# EAGLE board 411_AutoFan_V1.1 (EAGLE 9.6.2)
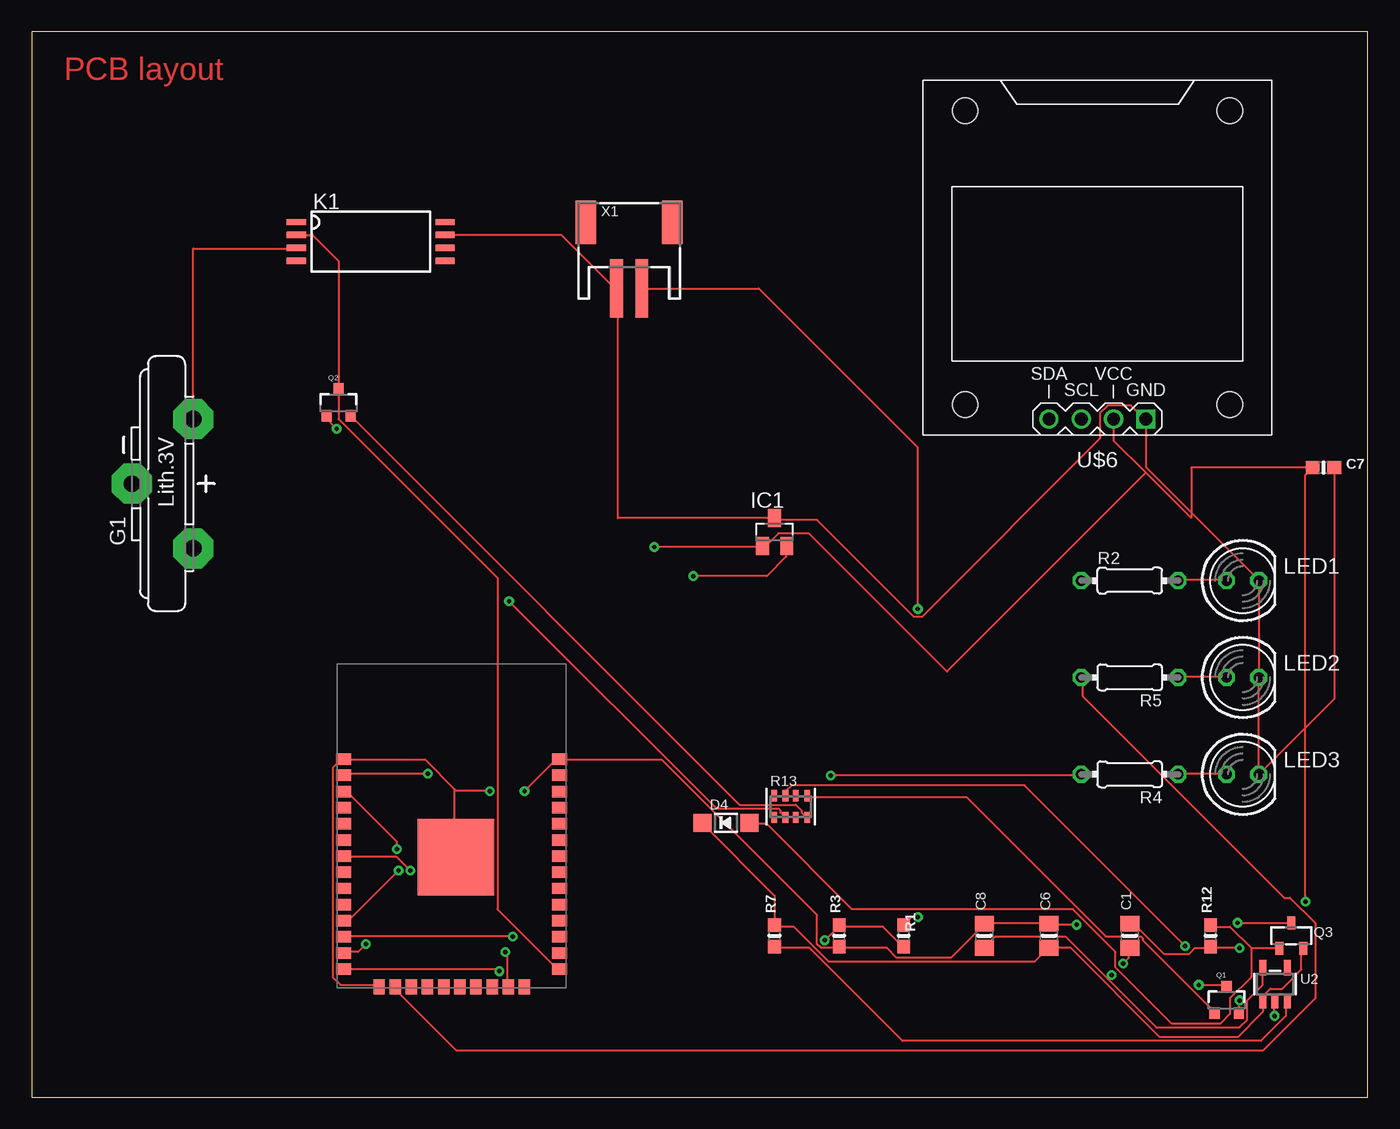
[diagram p0: board, top side]
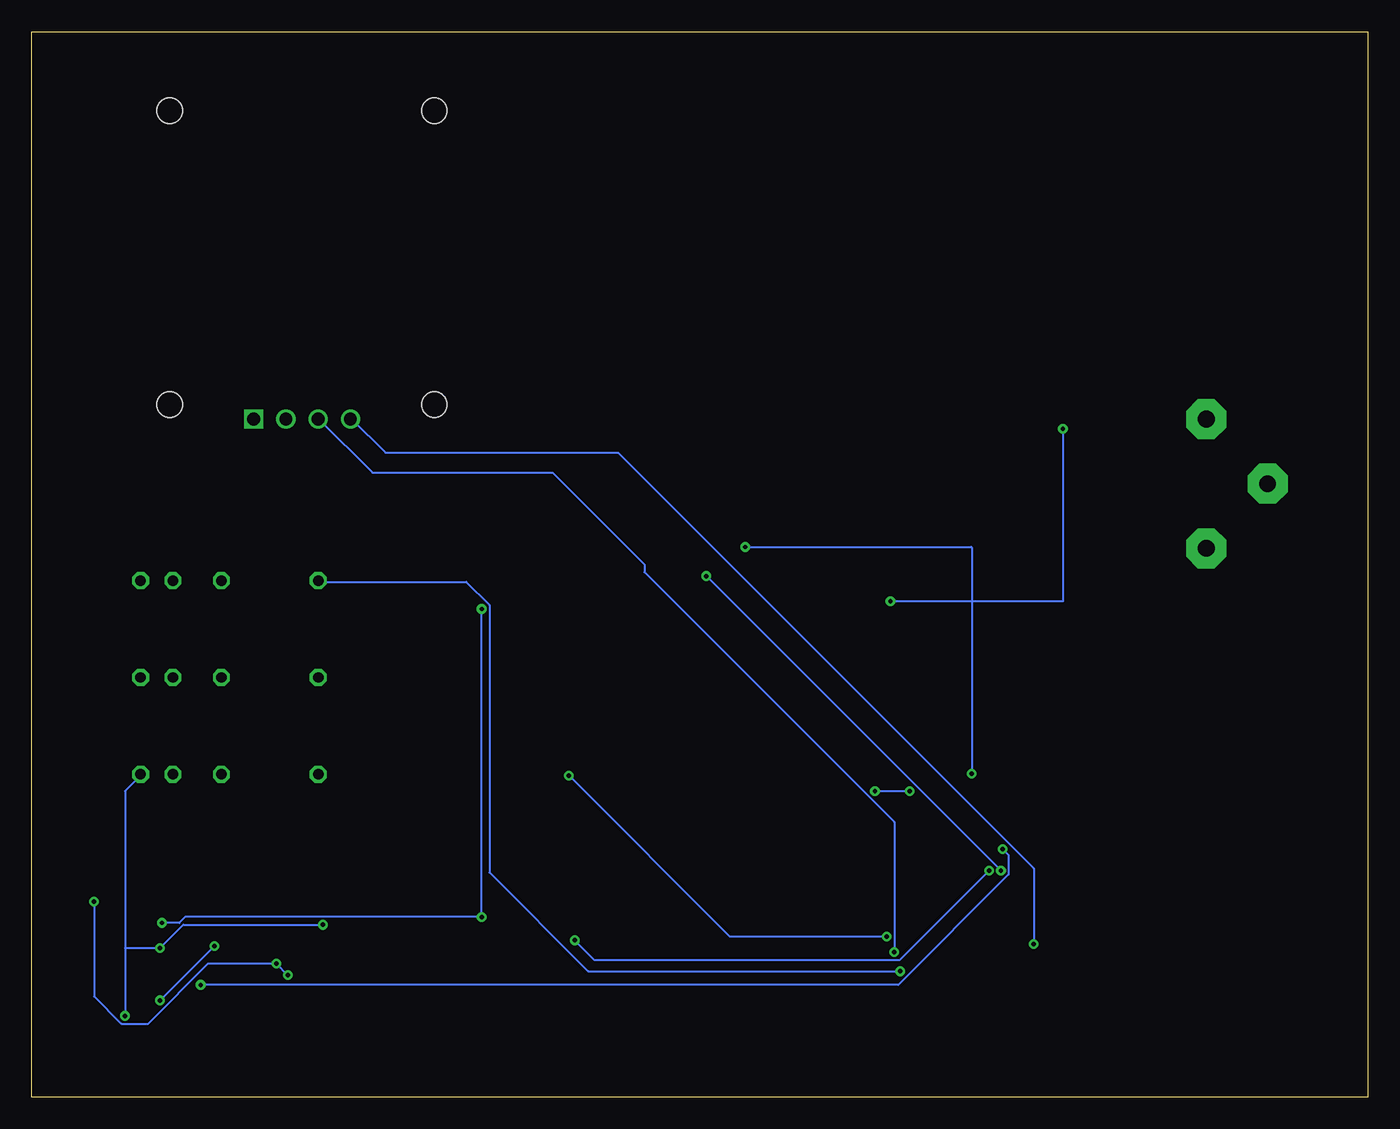
[diagram p1: board, bottom side, seen from below]

Size 105.08 x 83.81 mm. Coordinates in mm from the lower left corner, seen from the top.
Outline: 0,0 105.08,0 105.08,83.81 0,83.81 0,0
Copper layers (1*16): Top 0.035mm / dielectric 1.5mm / Bottom 0.035mm
Design rules "default": minimum track width 6mil, minimum drill 0.35mm, track to track 6mil, track to pad 6mil, pad to pad 6mil, via to via 6mil, smd to smd 6mil, copper to edge 40mil, drill to drill 6mil, minimum pad ring 10mil, minimum via ring 8mil, stop-mask expansion 4mil, vias tented up to drill 0mil, thermal gap 10mil

## Footprints (pad centres in the part's own frame; a part is rotated, then mirrored left to right if it is on the bottom)
0805-NO = smd 1.24 x 1.5: 1 -0.95,0; 2 0.95,0
0603-NO = smd 1.075 x 1: 1 -0.85,0; 2 0.85,0
SOD-123 = smd 1.4 x 1.4: A 1.85,0; C -1.85,0
CR2032V = drill 1.321 pad 3.15 octagon: + -2.54,-5.08; +@1 -2.54,5.08; - 2.286,0
SOT23 = smd 1 x 1.4: 1 -0.95,-1.1; 2 0.95,-1.1; 3 0,1.1
9802-00 = smd 1.524 x 0.508: 1 -5.842,1.524; 2 5.842,1.524; 3 -5.842,0.508; 4 5.842,0.508; 5 -5.842,-0.508; 6 5.842,-0.508; 7 -5.842,-1.524; 8 5.842,-1.524
LED5MM = drill 0.813 octagon: A -1.27,0; K 1.27,0
SOT23-3 = smd 0.8 x 0.9: 1 -0.95,-1; 2 0.95,-1; 3 0,1.1
SOT23-R = smd 0.635 x 1.016: 1 -0.95,-1; 2 0.95,-1; 3 0,1
0204/7 = drill 0.813 octagon: 1 -3.81,0; 2 3.81,0
RESPACK_4X0603 = smd 0.45 x 0.9: 1 -1.3,-0.85; 2 -0.4,-0.85; 3 0.4,-0.85; 4 1.3,-0.85; 5 1.3,0.85; 6 0.4,0.85; 7 -0.4,0.85; 8 -1.3,0.85
SOT23-5 = smd 0.55 x 1.2: 1 -0.95,-1.3; 2 0,-1.3; 3 0.95,-1.3; 4 0.95,1.3; 5 -0.95,1.3
DISPLAY-OLED-128X64-I2C = drill 1 square: 1 -3.81,12.7 | drill 1: 2 -1.27,12.7; 3 1.27,12.7; 4 3.81,12.7 | hole 2: -10.414,11.557; 10.414,11.557; 10.414,-11.557; -10.414,-11.557
JSTPH2 = smd 1 x 4.6: 1 -1,-3.7; 2 1,-3.7 | smd 1.6 x 3.4: NC1 -3.4,1.5; NC2 3.4,1.5
WROOM32_SKINNY = smd 1.2 x 0.9: 1 -8.5,5; 2 -8.5,3.73; 3 -8.5,2.46; 4 -8.5,1.19; 5 -8.5,-0.08; 6 -8.5,-1.35; 7 -8.5,-2.62; 8 -8.5,-3.89; 9 -8.5,-5.16; 10 -8.5,-6.43; 11 -8.5,-7.7; 12 -8.5,-8.97; 13 -8.5,-10.24; 14 -8.5,-11.51; 25 8.5,-11.51; 26 8.5,-10.24; 27 8.5,-8.97; 28 8.5,-7.7; 29 8.5,-6.43; 30 8.5,-5.16; 31 8.5,-3.89; 32 8.5,-2.62; 33 8.5,-1.35; 34 8.5,-0.08; 35 8.5,1.19; 36 8.5,2.46; 37 8.5,3.73; 38 8.5,5 | smd 0.9 x 1.2: 15 -5.7,-12.9; 16 -4.43,-12.9; 17 -3.16,-12.9; 18 -1.89,-12.9; 19 -0.62,-12.9; 20 0.65,-12.9; 21 1.92,-12.9; 22 3.19,-12.9; 23 4.46,-12.9; 24 5.73,-12.9 | smd 6 x 6: P$1 0.34,-2.7

## Placement (x,y rotation side)
C1  10uF  [0805-NO]  86.36,12.7 90 top
C6  10µF  [0805-NO]  80.01,12.7 90 top
C7  1uF  [0603-NO]  101.6,49.53 0 top
C8  10µF  [0805-NO]  74.93,12.7 90 top
D4  MBR120  [SOD-123]  54.61,21.59 0 top
G1  CR2032V  [CR2032V]  10.16,48.26 180 top
IC1  LM50  [SOT23]  58.42,44.45 0 top
K1  9802-03-00  [9802-00]  26.67,67.31 0 top
LED1  [LED5MM]  95.25,40.64 0 top
LED2  [LED5MM]  95.25,33.02 0 top
LED3  [LED5MM]  95.25,25.4 0 top
Q1  mmbt2222  [SOT23-3]  93.98,7.62 0 top
Q2  mmbt2222  [SOT23-3]  24.13,54.61 0 top
Q3  DMG3415U  [SOT23-R]  99.06,12.7 0 top
R1  100K  [0603-NO]  68.58,12.7 90 top
R2  220  [0204/7]  86.36,40.64 0 top
R3  100K  [0603-NO]  63.5,12.7 90 top
R4  220  [0204/7]  86.36,25.4 180 top
R5  220  [0204/7]  86.36,33.02 180 top
R7  100K  [0603-NO]  58.42,12.7 90 top
R12  100K  [0603-NO]  92.71,12.7 90 top
R13  10K  [RESPACK_4X0603]  59.69,22.86 0 top
U2  AP2112-3.3  [SOT23-5]  97.79,8.89 0 top
U$6  DISPLAY-OLED-128X64-I2C  [DISPLAY-OLED-128X64-I2C]  83.82,66.04 180 top
X1  JSTPH  [JSTPH2]  46.99,67.31 0 top
X2  ESP32_WROOM32_SKINNY  [WROOM32_SKINNY]  33.02,21.59 0 top

## Library data of the parts
C1 C6-C8 D4 Q3 R1 R3 R7 R12 R13 U2 X1 X2 = microbuilder
G1 = battery
IC1 = linear
K1 = relay; OC_FARNELL: unknown; OC_NEWARK: unknown
LED1-LED3 = led
Q1 Q2 = SparkFun
R2 R4 R5 = rcl; SPICEPREFIX: R
U$6 = diy-modules

## Nets
3.3V: C1.1 C7.1 C8.1 IC1.1 U2.5 U$6.2 X2.2
A0_DAC2: IC1.2 X2.11
A1_DAC1: X2.10
A2_I34: X2.6
A3_I39: X2.5
A4_IO36: X2.4
A5_IO4: X2.26
A13_I35: R1.1 R3.2 X2.7
DTR: Q2.2 R13.4
EN: R7.1 U2.3
GND: C1.2 C6.2 C7.2 C8.2 IC1.3 K1.4 LED1.K LED2.K LED3.K R3.1 R12.1 U2.2 U$6.1 X1.1 X2.1 X2.15 X2.38 X2.P$1
GPIO0: K1.3 Q2.3 X2.25
GPIO2: X2.24
IO12_A11: R2.1 X2.14
IO13_A12: R5.2 X2.16
IO14_A6: U$6.4 X2.13
IO15_A8: U$6.3 X2.23
IO16: X2.27
IO17: X2.28
IO21: X2.33
IO27_A10: R4.2 X2.12
IO32_A7: X2.8
IO33_A9: X2.9
MISO: X2.31
MOSI: X2.30
N$1: LED1.A R2.2
N$2: LED3.A R4.1
N$3: LED2.A R5.1
N$5: K1.6
N$6: G1.-
N$7: C6.1 D4.C Q3.2 R7.2 U2.1
N$8: G1.+ K1.5
N$12: Q1.1 R13.5
N$13: Q2.1 R13.2
RESET: Q1.3 X2.3
RTS: Q1.2 R13.7
RXD0: X2.34
SCK: X2.29
SCL: X2.36
SDA: X2.37
TXD0: X2.35
VBAT: Q3.3 R1.2 X1.2
VBUS: D4.A Q3.1 R12.2

## Tracks (layer width: path | path; a pad name or v marks a point on that pad's centre or on a via)
3.3V  (via drill 0.35)
  Top 0.152: v31.14,25.45 24.59,25.45 X2.2 | v48.97,43.28 57.35,43.28 IC1.1 57.51,43.43 57.81,43.43 58.73,44.35 61.11,44.35 71.98,33.48 87.63,49.12 | 84.63,9.3 81.28,12.65 75.79,12.65 75.03,11.89 C8.1 | 84.63,9.3 88.44,5.49 95,5.49 95.61,6.1 95.61,7.62 96.83,8.84 96.83,10.06 U2.5 | v85.85,10.52 86.31,10.97 86.31,11.73 C1.1 | 84.63,9.3 v84.94,9.6 | 87.63,49.12 85.09,51.66 U$6.2 | 87.63,49.12 91.19,45.57 91.19,49.53 C7.1 100.18,48.96 v100.18,15.39
  Bottom 0.152: v48.97,43.28 31.19,43.28 31.14,43.23 v31.14,25.45 | v84.94,9.6 v85.85,10.52 91.19,10.52 95.91,5.79 98.04,5.79 100.18,7.93 v100.18,15.39
A0_DAC2  (via drill 0.35)
  Top 0.152: v28.85,17.83 25.04,14.02 24.59,14.02 X2.11 | v52.02,41 57.81,41 59.33,42.52 59.33,43.28 IC1.2
  Bottom 0.152: v52.02,41 v28.85,17.83
A13_I35  (via drill 0.35)
  Top 0.152: R1.1 68.48,11.89 66.95,13.41 63.6,13.41 R3.2 63.45,13.41 v62.38,12.34 | v29.77,17.83 28.7,18.9 24.59,18.9 X2.7
  Bottom 0.152: v29.77,17.83 36.78,10.82 60.86,10.82 v62.38,12.34
DTR
  Top 0.152: R13.4 60.86,22.1 60.55,22.4 60.55,22.55 60.1,23.01 55.68,23.01 25.2,53.49 Q2.2
EN
  Top 0.152: R7.1 58.42,11.73 61.16,11.73 68.48,4.42 96.67,4.42 98.65,6.4 98.65,7.47 U2.3
GND  (via drill 0.35)
  Top 0.152: 33.27,24.08 33.27,18.9 X2.P$1 | 33.27,24.08 33.27,24.23 30.99,26.52 24.59,26.52 X2.1 24.44,26.67 23.67,25.91 23.67,9.45 24.28,8.84 27.18,8.84 X2.15 | v36.02,24.08 33.27,24.08 | v38.76,24.08 41.2,26.52 41.5,26.52 X2.38 41.66,26.52 49.58,26.52 61.77,14.33 61.77,12.04 62.08,11.73 63.45,11.73 R3.1 63.6,11.73 67.26,11.73 68.02,10.97 72.29,10.97 74.88,13.56 C8.2 75.03,13.72 79.91,13.72 C6.2 80.06,13.56 v82.19,13.56 | K1.4 41.66,67.82 45.92,63.55 X1.1 46.08,63.55 46.08,45.55 IC1.3 58.42,45.41 61.77,45.41 69.39,37.8 70,37.8 84.02,51.82 84.02,53.8 84.63,54.41 86.46,54.41 87.53,53.34 U$6.1 87.68,53.34 87.68,49.53 96.52,40.69 LED1.K LED2.K LED3.K 102.45,31.33 C7.2 | 92.71,11.73 91.49,11.73 91.03,11.28 89.05,11.28 86.77,13.56 86.46,13.56 C1.2 | v97.74,6.4 97.74,7.47 U2.2 | v95,11.73 92.71,11.73 | 92.71,11.73 R12.1
  Bottom 0.152: v38.76,24.08 v36.02,24.08 | 97.74,11.73 97.74,24.08 96.52,25.3 LED3.K | 97.74,11.73 v97.74,6.4 | 97.74,11.73 v95,11.73 93.17,13.56 v82.19,13.56
GPIO0
  Top 0.152: K1.3 22.1,67.82 24.13,65.79 Q2.3 24.13,53.34 36.63,40.84 36.63,14.78 41.2,10.21 41.5,10.21 X2.25
IO12_A11  (via drill 0.35)
  Top 0.152: v36.78,9.91 36.63,10.06 24.59,10.06 X2.14
  Bottom 0.152: v36.78,9.91 61.32,9.91 69.09,17.68 69.09,38.71 70.92,40.54 82.5,40.54 R2.1
IO13_A12
  Top 0.152: X2.16 28.7,8.69 28.7,8.38 33.43,3.66 96.83,3.66 100.94,7.77 100.94,13.72 98.96,15.7 98.5,15.7 82.65,31.55 82.65,32.92 R5.2
IO14_A6  (via drill 0.35)
  Top 0.152: v26.26,12.04 25.65,11.43 24.59,11.43 X2.13
  Bottom 0.152: v26.26,12.04 26.26,17.98 58.98,50.7 77.27,50.7 79.91,53.34 U$6.4
IO15_A8  (via drill 0.35)
  Top 0.152: v37.24,11.43 37.39,11.28 37.39,8.84 X2.23
  Bottom 0.152: v37.24,11.43 37.24,21.64 56.9,41.3 56.9,41.91 64.11,49.12 78.28,49.12 82.5,53.34 U$6.3
IO27_A10  (via drill 0.35)
  Top 0.152: v37.85,12.65 24.59,12.65 X2.12 | v62.84,25.3 82.5,25.3 R4.2
  Bottom 0.152: v37.85,12.65 50.19,12.65 v62.84,25.3
N$1
  Top 0.152: R2.2 90.27,40.69 93.93,40.69 LED1.A
N$2
  Top 0.152: R4.1 90.27,25.45 93.93,25.45 LED3.A
N$3
  Top 0.152: R5.1 90.27,33.07 93.93,33.07 LED2.A
N$7
  Top 0.152: D4.C 52.78,21.49 58.42,15.85 R7.2 58.42,13.41 59.94,13.41 62.69,10.67 78.84,10.67 79.91,11.73 C6.1 80.06,11.73 81.74,11.73 88.75,4.72 94.84,4.72 96.83,6.71 96.83,7.47 U2.1 96.98,7.62 96.98,8.08 97.43,8.53 98.35,8.53 99.87,10.06 99.87,11.58 Q3.2
N$8
  Top 0.152: G1.+ 12.7,66.75 20.78,66.75 K1.5
N$12
  Top 0.152: Q1.1 93.02,6.71 87.38,12.34 87.38,12.5 87.22,12.65 84.48,12.65 73.51,23.62 61.01,23.62 R13.5
N$13  (via drill 0.35)
  Top 0.152: v37.54,39.01 53.85,22.71 58.73,22.71 58.88,22.55 58.88,22.4 59.18,22.1 R13.2 | v23.98,52.58 23.06,53.49 Q2.1
  Bottom 0.152: v23.98,52.58 23.98,39.01 v37.54,39.01
RESET  (via drill 0.35)
  Top 0.152: v91.8,8.84 93.93,8.84 Q1.3 | v28.7,19.51 28.7,20.12 24.89,23.93 24.59,23.93 X2.3
  Bottom 0.152: v91.8,8.84 36.93,8.84 28.24,17.53 28.24,19.05 v28.7,19.51
RTS  (via drill 0.35)
  Top 0.152: v90.73,11.89 78.08,24.54 59.79,24.54 59.33,24.08 59.33,23.77 R13.7 | v95,7.62 95,6.71 Q1.2
  Bottom 0.152: v95,7.62 v90.73,11.89
VBAT  (via drill 0.35)
  Top 0.152: v94.84,13.72 98.96,13.72 Q3.3 | v69.7,14.17 69.24,14.17 68.63,13.56 R1.2 | X1.2 57.19,63.61 69.7,51.11 v69.7,38.41
  Bottom 0.152: v94.84,13.72 93.47,13.72 93.02,14.17 v69.7,14.17 v69.7,38.41
VBUS
  Top 0.152: 95.91,11.73 98.04,11.73 Q3.1 | 95.91,11.73 94.23,13.41 92.71,13.41 R12.2 | 95.91,11.73 95.91,9.45 94.23,7.77 94.23,6.55 93.47,5.79 89.66,5.79 85.24,10.21 85.24,11.43 81.89,14.78 64.52,14.78 57.81,21.49 56.59,21.49 D4.A

## Text on the board
Top: PCB layout